# EAGLE board blinkmusb_b0_noisp (EAGLE 5.11)
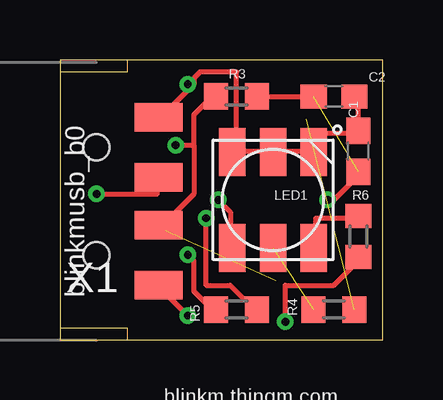
[diagram p0: board, top side]
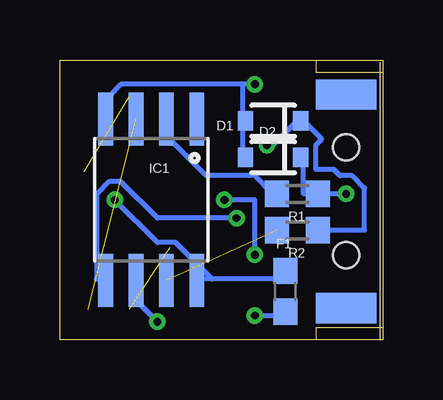
[diagram p1: board, bottom side, seen from below]

Size 13.46 x 11.68 mm. Coordinates in mm from the lower left corner, seen from the top.
Outline: 2.79,0 0,0 0,0.51
Outline: 2.79,0 13.46,0 13.46,11.68 2.79,11.68
Outline: 2.79,11.68 0,11.68 0,11.18
Outline: 0,11.18 0,0.51
Outline: 2.79,11.68 2.79,11.18 0,11.18
Outline: 0,0.51 2.79,0.51 2.79,0
Copper layers (1*16): Top 0.0356mm / dielectric 1.5011mm / Bottom 0.0356mm
Design rules "LaenPCBOrder *": minimum track width 8mil, minimum drill 13mil, track to track 6mil, track to pad 8mil, pad to pad 8mil, via to via 8mil, smd to smd 6mil, copper to edge 15mil, drill to drill 8mil, minimum pad ring 7mil, minimum via ring 7mil, stop-mask expansion 4mil, vias tented up to drill 0mil, thermal gap 10mil

## Footprints (pad centres in the part's own frame; a part is rotated, then mirrored left to right if it is on the bottom)
C0603 = smd 1.1 x 1: 1 -0.85,0; 2 0.85,0
SOD-323 = smd 0.63 x 0.83: 1 -1.15,0; 2 1.15,0
0603 = smd 1.1 x 1: 1 -0.85,0; 2 0.85,0
SO08-EIAJ = smd 0.61 x 2.21: 1 -1.905,-3.378; 2 -0.635,-3.378; 3 0.635,-3.378; 4 1.905,-3.378; 5 1.905,3.353; 6 0.635,3.353; 7 -0.635,3.353; 8 -1.905,3.353
RGBLED5050 = smd 2 x 1.1: 1 -2,1.7; 2 -2,0; 3 -2,-1.7; 4 2,-1.7; 5 2,0; 6 2,1.7
R0603 = smd 1 x 1.1: 1 -0.85,0; 2 0.85,0
MOLEX-48037-1000 = smd 2 x 1.2: 1 2.6,-3.5; 2 2.6,-1; 3 2.6,1; 4 2.6,3.5 | smd 2.54 x 1.27 bottom: P$1 0,4.45; P$2 0,-4.45 | hole 1.1: 0,2.25; 0,-2.25

## Placement (x,y rotation side)
C1  100n  [C0603]  12.45,7.87 90 top
C2  10uF  [C0603]  11.43,10.16 0 top
D1  3.6V  [SOD-323]  4.57,9.14 180 bottom
D2  3.6V  [SOD-323]  4.57,7.62 180 bottom
F1  PTC0603  [0603]  4.06,2.03 90 bottom
IC1  ATTINY45SOIC  [SO08-EIAJ]  9.65,5.84 180 bottom
LED1  RGBLED5050  [RGBLED5050]  8.89,5.84 90 top
R1  68  [R0603]  3.56,6.1 0 bottom
R2  68  [R0603]  3.56,4.57 0 bottom
R3  1k5  [R0603]  7.37,10.16 180 top
R4  100  [R0603]  11.43,1.27 180 top
R5  100  [R0603]  7.37,1.27 180 top
R6  60  [R0603]  12.45,4.32 90 top
X1  USB  [MOLEX-48037-1000]  1.52,5.79 0 top

## Library data of the parts
C1 C2 R1-R6 = rcl
D1 D2 F1 = SparkFun-20110517
IC1 X1 = todstuff
LED1 = adafruit-20120122

## Nets
BLU: IC1.6 R6.1
D+: IC1.2 R1.1
D-: IC1.7 R2.1
GND: C1.2 C2.2 D1.2 D2.2 IC1.4 LED1.4 LED1.5 LED1.6 X1.4
GRN: IC1.5 R5.1
N$4: D2.1 R1.2 X1.3
N$5: D1.1 R2.2 R3.2 X1.2
N$13: F1.1 X1.1
RBLU: LED1.3 R6.2
RED: IC1.3 R4.1
RGRN: LED1.1 R5.2
RRED: LED1.2 R4.2
RST: IC1.1
VCC: C1.1 C2.1 F1.2 IC1.8 R3.1

## Tracks (layer width: path | path; a pad name or v marks a point on that pad's centre or on a via)
BLU  (via drill 0.33)
  Top 0.203: v9.4,0.76 9.4,2.29 11.43,2.29 12.45,3.3 R6.1
  Bottom 0.203: v9.4,0.76 10.16,1.52 10.16,2.29 IC1.6
D+
  Bottom 0.203: R1.1 4.57,6.1 5.33,6.86 7.37,6.86 8.89,8.38 8.89,9.14 IC1.2
D-  (1 unrouted)
GND  (via drill 0.33)
  Top 0.203: C2.2 12.45,10.16 12.45,8.89 C1.2 12.45,8.64 10.67,8.64 10.67,7.87 LED1.4 10.41,7.87 8.89,7.87 | 5.59,10.67 4.32,9.4 X1.4 | 5.59,10.67 5.59,10.92 5.84,11.18 7.37,11.18 7.37,7.87 | 7.37,7.87 LED1.6 7.37,7.87 | 7.37,7.87 8.89,7.87 | 8.89,7.87 LED1.5 8.89,7.87 | 5.59,10.67 v5.33,10.67
  Bottom 0.203: 5.84,9.14 5.84,7.62 D2.2 | 5.84,9.14 D1.2 5.84,9.14 | 5.84,10.67 5.84,9.14 | 5.84,10.67 10.92,10.67 11.43,10.16 11.43,9.4 IC1.4 | v5.33,10.67 5.84,10.67
GRN  (via drill 0.33)
  Top 0.203: v6.1,5.08 6.1,2.29 7.11,2.29 8.13,1.27 R5.1
  Bottom 0.203: v6.1,5.08 9.4,5.08 10.92,6.6 11.43,6.6 11.94,6.1 11.94,2.54 11.68,2.54 IC1.5
N$4  (via drill 0.33)
  Top 0.203: v1.52,6.1 4.06,6.1 4.06,6.6 X1.3
  Bottom 0.203: D2.1 3.3,7.62 3.3,6.1 2.79,6.1 R1.2 2.54,6.1 v1.52,6.1
N$5  (via drill 0.33)
  Top 0.203: 5.59,8.13 5.59,6.1 4.32,4.83 X1.2 | 5.59,8.13 5.59,9.4 6.35,10.16 R3.2 | v4.83,8.13 5.59,8.13
  Bottom 0.203: R2.2 2.54,4.57 0.76,4.57 0.76,6.35 1.27,6.86 1.78,6.86 2.03,7.11 2.79,7.11 2.79,8.13 2.54,8.38 3.3,9.14 D1.1 3.56,9.14 4.57,8.13 v4.83,8.13
N$13  (via drill 0.33)
  Top 0.203: v5.33,1.02 4.32,2.03 4.32,2.29 X1.1
  Bottom 0.203: v5.33,1.02 4.06,1.02 F1.1
RBLU
  Top 0.203: R6.2 12.45,5.08 10.67,5.08 10.67,4.06 LED1.3
RED  (1 unrouted)
RGRN  (via drill 0.33)
  Top 0.203: v5.33,3.56 5.59,3.3 5.59,2.03 6.35,1.27 R5.2 | v6.6,5.84 7.11,5.33 7.11,4.06 LED1.1
  Bottom 0.203: v5.33,3.56 5.33,5.84 v6.6,5.84
RRED  (1 unrouted)
VCC  (via drill 0.33)  (1 unrouted)
  Top 0.203: v11.18,5.84 11.43,5.84 12.45,6.86 C1.1 | R3.1 8.38,10.16 10.41,10.16 C2.1
  Bottom 0.203: 7.11,2.54 7.62,2.54 IC1.8 | 7.11,2.54 4.32,2.54 4.06,2.79 F1.2 | v11.18,5.84 9.4,4.06 8.64,4.06 7.11,2.54

## Text on the board
tPlace: BlinkM USB | blinkmusb_b0 | blinkm.thingm.com